# Altium PCB PCB.PcbDoc
Units mil, origin at the board's own origin, x right, y up, seen from the top; angles counter-clockwise.
Board outline 2435 x 2265 mil, 2 copper layers (Top Layer, Bottom Layer); 22 components, 11 nets, 57 pads, 5 vias.
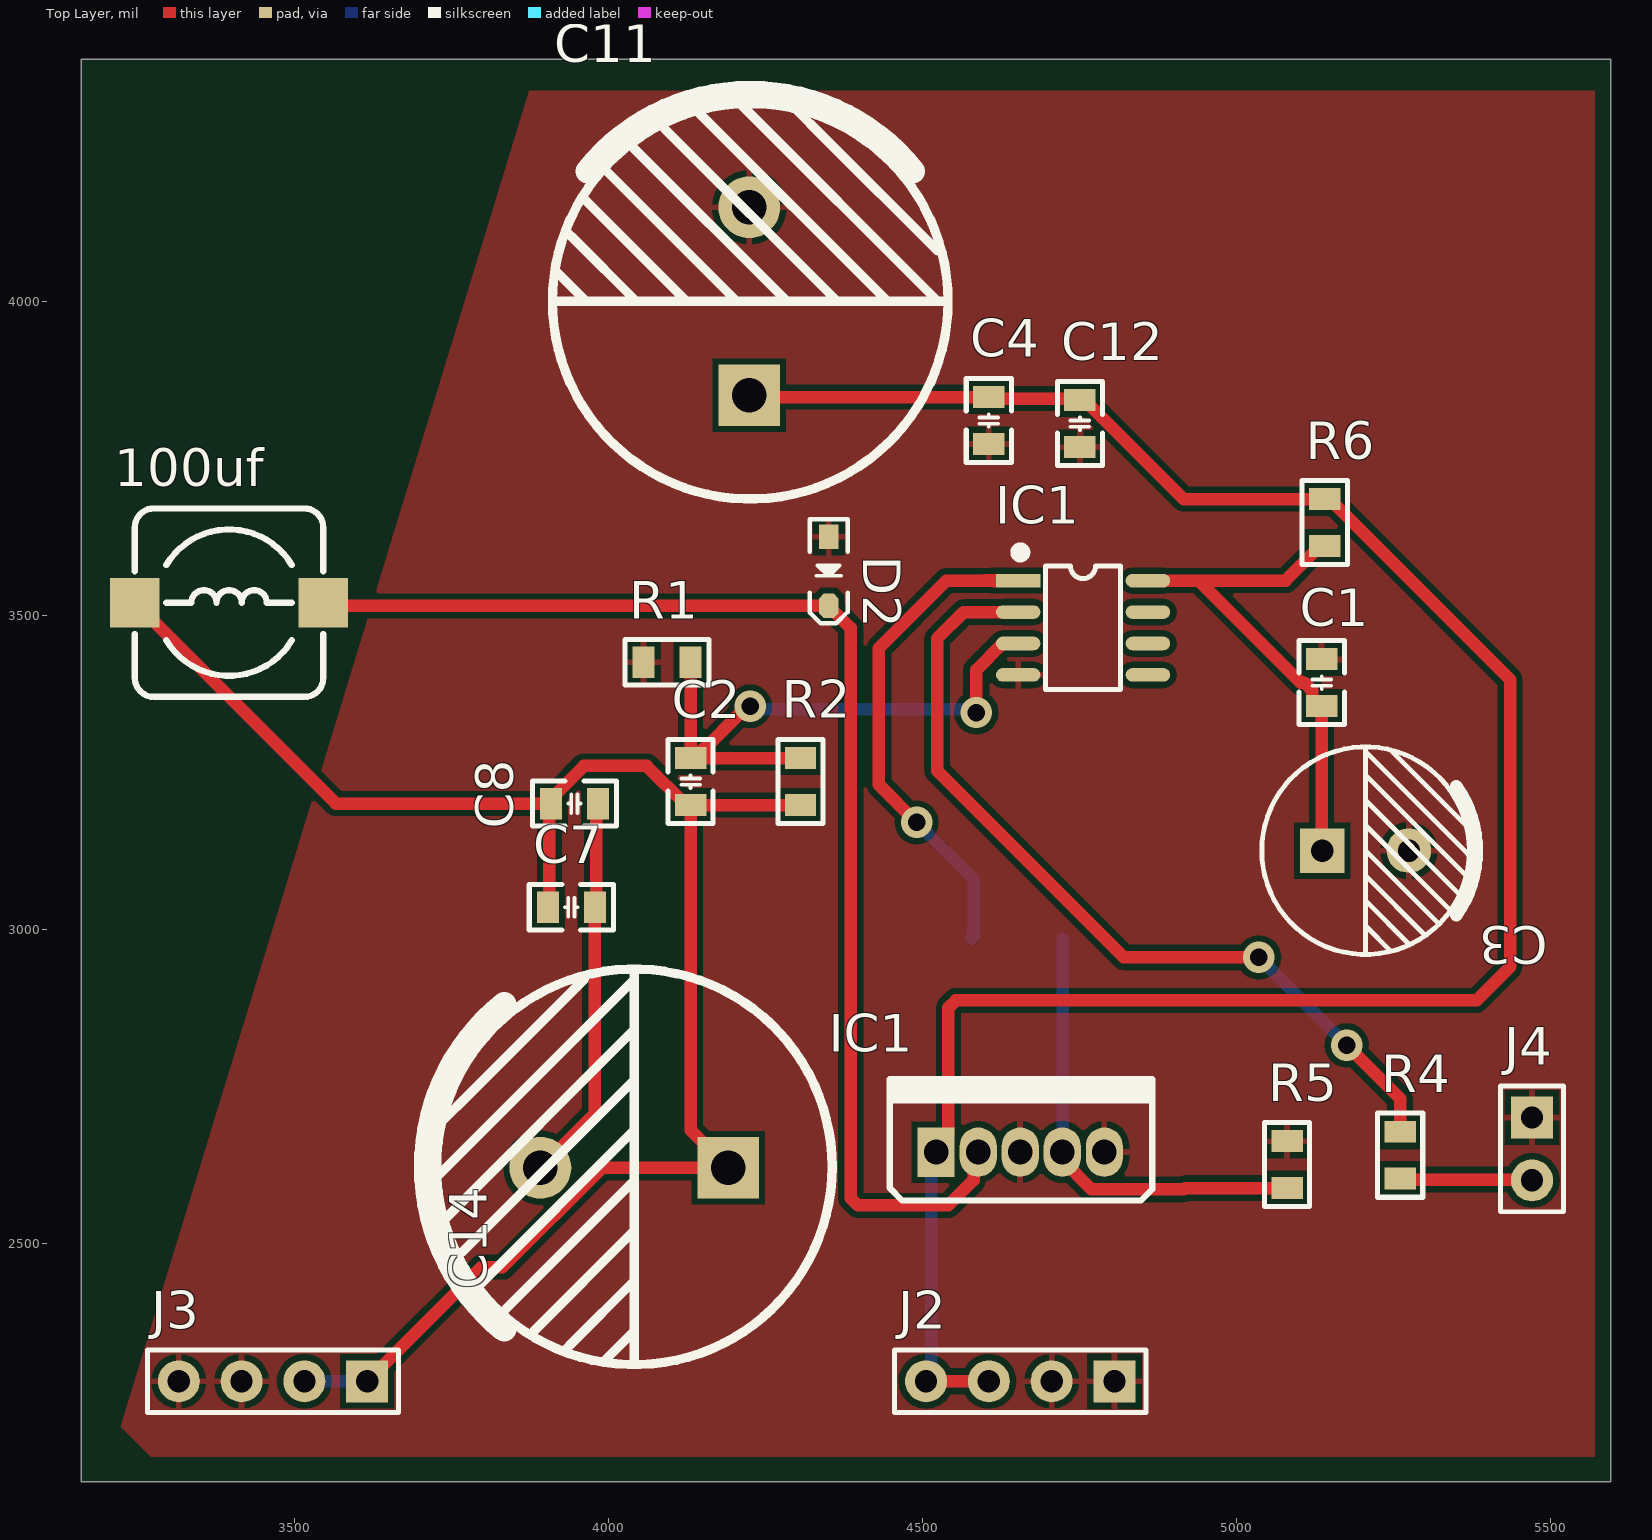
[diagram p0: Top Layer view]
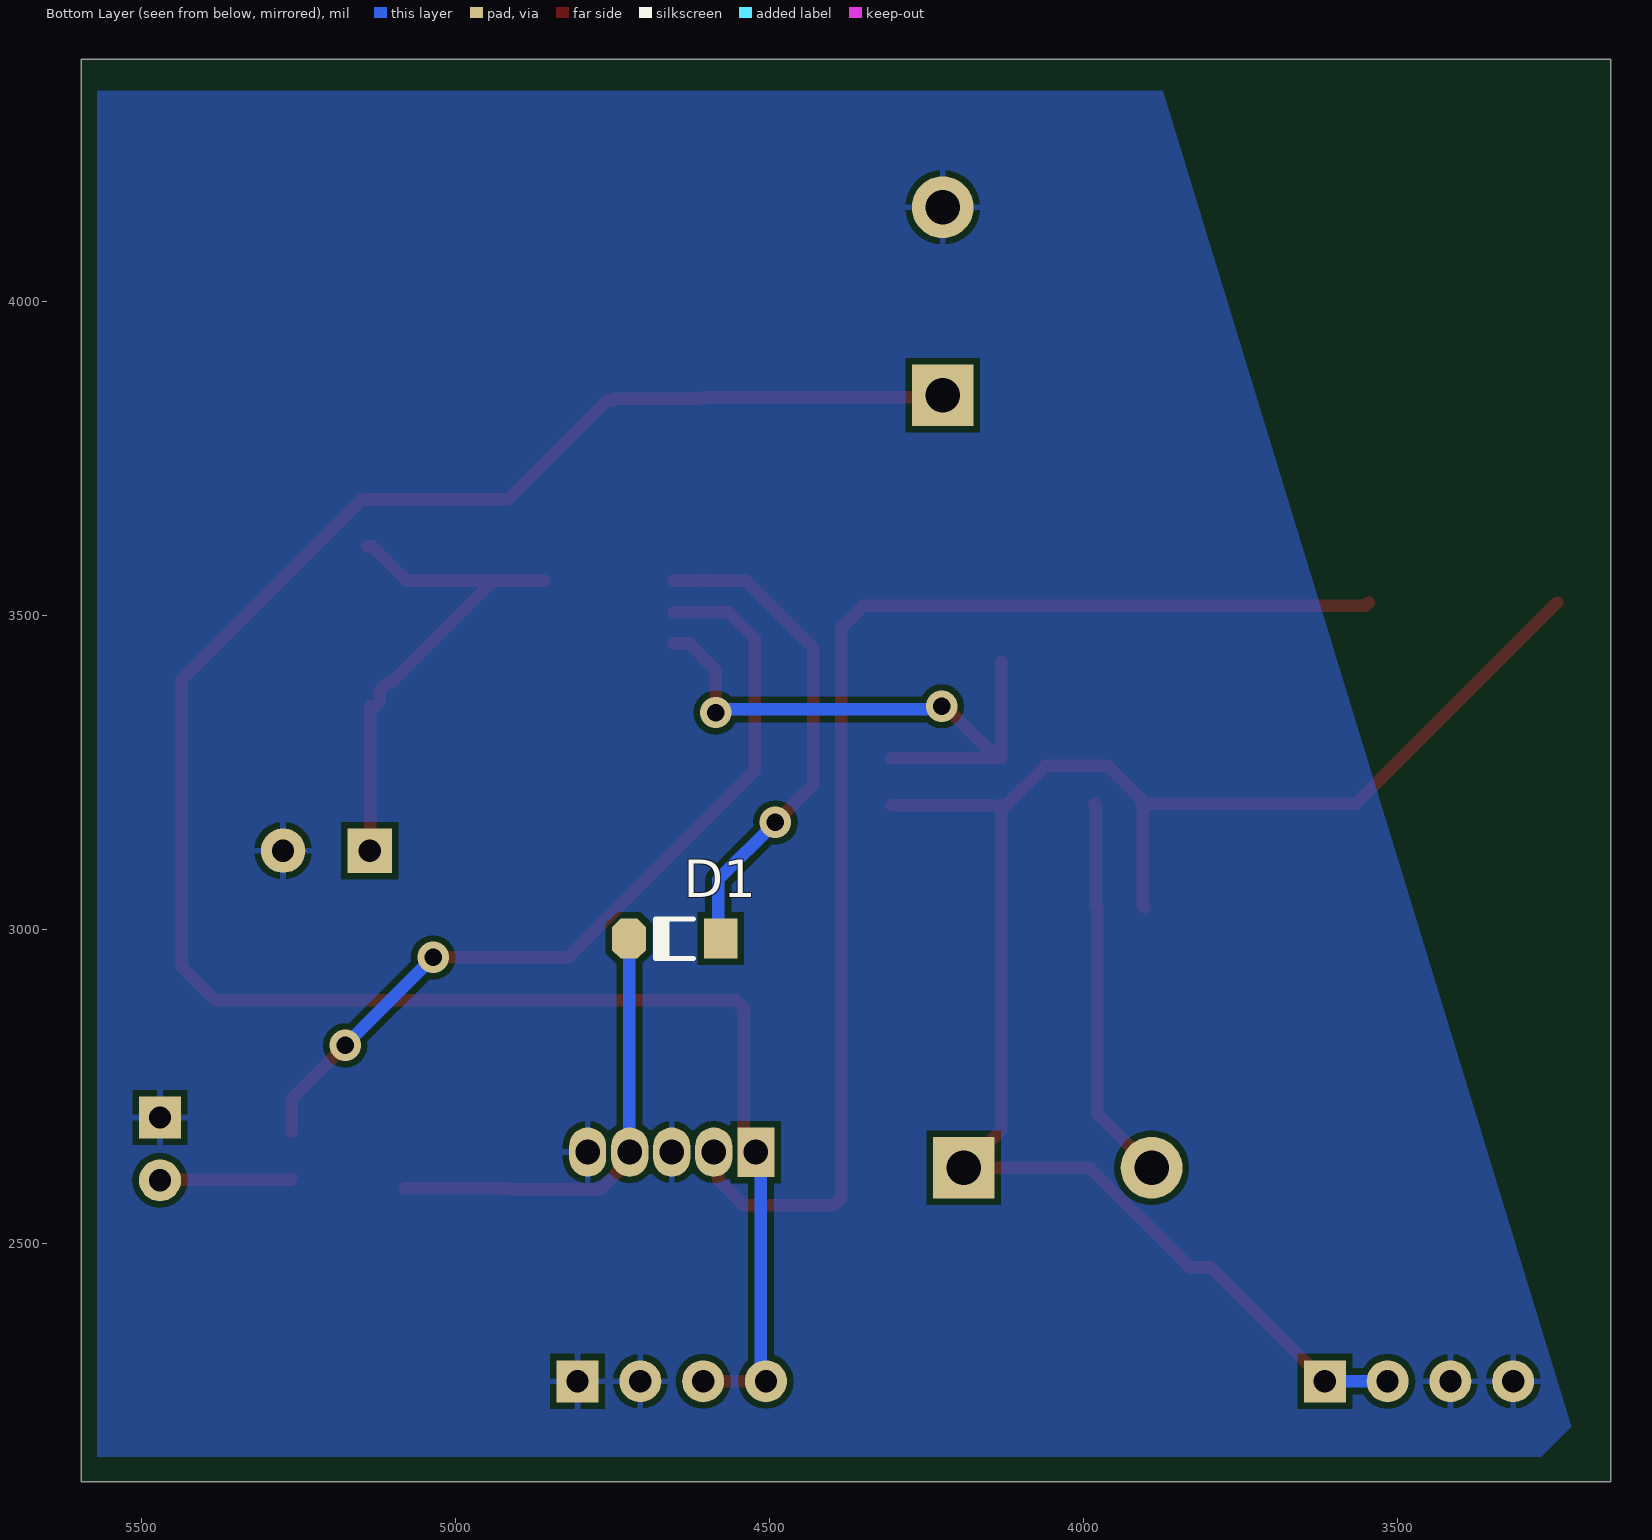
[diagram p1: Bottom Layer view, seen from below]

## Layer stack, top to bottom
Top Solder: solder mask 0.4, Solder Resist, Dk 3.5
Top Layer: signal copper 1.4
Dielectric 1: dielectric 12.6, FR-4, Dk 4.8
Bottom Layer: signal copper 1.4
Bottom Solder: solder mask 0.4, Solder Resist, Dk 3.5

## Board outline
3160,2120 5595,2120 5595,4385 3160,4385

## Design rules (kind name [scope] priority, off if disabled: settings)
Clearance [All] p1: gap=10 ignorepadtopadclearanceinfootprint=FALSE except(0: Arc-Hole Track-Hole SMDPad-Hole THPad-Hole Via-Hole Fill-Hole Poly-Hole Region-Hole Text-Hole)
PolygonConnect [All] p1: connectstyle=Relief reliefconductorwidth=10 reliefentries=4 polygonreliefangle="90 Angle" airgapwidth=10
RoutingVias [All] p1: holewidth=28 width=50 viastyle="Through Hole" minholewidth=28 minwidth=50 maxholewidth=28 maxwidth=50
SolderMaskExpansion [All] p1: expansion=4 istentingtop=FALSE
Width [All] p1: maxlimit=20 minlimit=20 preferedwidth=20 minimp=50.000000 maximp=50.000000 favimp=50.000000
30 further rules are at their usual default settings.

## Components (designator, comment, footprint, x,y, rotation, side; value= is the part's Value field where it differs from the comment)
100uf "L1" CDRH74 3395,3520 r0 top
C1 "104" "C 0805_L" 5135,3392.6 r270 top
C2 "101" "C 0805_L" 4130,3235 r270 top
C3 "100uf'" "CAP 3.5*8*11.5" 5205,3125 r0 top
C4 "104" "C 0805_L" 4605,3810 r90 top
C7 "104" "C 0805_L" 3940,3035 r180 top
C8 "104" "C 0805_L" 3945,3200 r180 top
C11 "2200uf'" "CAP 7.5*16*31.5" 4225,4000 r90 top
C12 "103" "C 0805_L" 4750,3805 r90 top
C14 "2200uf'" "CAP 7.5*16*31.5" 4040.39,2621.5 r180 top
D1 "1N4148" "MINI_MELF (LL34)" 4650,2985 r0 bottom
D2 "B5919WS" SOD-323 4350,3570 r270 top
IC1 "LM2596-adj" TO220-5A 4521.14,2645 r0 top
IC1 "LM358" SOP8_N 4755,3480 r0 top
J2 "+24VDC" HDR2.54-LI-4P 4655,2280 r180 top
J3 "Vout" HDR2.54-LI-4P 3465,2280 r180 top
J4 "HDR-1X2" HDR2.54-M-LI-2P 5470,2650 r270 top
R1 "10K" "R 0805_L" 4092.6,3425 r0 top
R2 "30K" "R 0805_L" 4305,3235 r270 top
R4 "1K" "R 0805_L" 5260,2640 r90 top
R5 "1K" "R 0805_L" 5080,2625 r90 top
R6 "10" "R 0805_L" 5140,3647.4 r90 top

## Footprints (in the part's own frame and the unit in brackets; to place one, negate y for a bottom-side part, rotate by r counter-clockwise, add the part's x,y. Pads: shape width x height; smd on the part's side, far side on the other; paste and mask are expansions set on the pad)
"C 0805_L" [mil] "无极性贴片电容                    @sucaita.com 素材塔"
  rect 35x50 smd: 1(-37.4,0) 2(37.4,0)
  silkscreen extent -67,-36 67,36, body extent -39,-24 39,24, height 20
"CAP 3.5*8*11.5" [mm] "脚距3.5mm直径8mm高度11.5mm"
  rect 1.8x1.8 hole 0.9: 1(-1.75,0)
  round 1.8 hole 0.9: 2(1.75,0)
  silkscreen extent -4.2,-4.2 4.5,4.2, body extent -4,-4 4.01,4, height 11.53
"CAP 7.5*16*31.5" [mm] "脚距7.5mm直径16mm高度31.5mm"
  rect 2.5x2.5 hole 1.4: 1(-3.8,0.038)
  round 2.5 hole 1.4: 2(3.8,0.038)
  silkscreen extent -8,-8 8.42,8, body extent -8,-8 8.01,8, height 31.53
CDRH74 [mm] "7.3*7.3*4.5mm（长宽高）"
  rect 2x2 smd: 1(-3.81,0) 2(3.81,0)
  silkscreen extent -3.81,-3.81 3.81,3.81, body extent -3.65,-3.65 3.65,3.65, height 4.5
HDR2.54-LI-4P [mm] "排针，4脚"
  rect 1.7x1.7 hole 0.9: 1(-3.81,0)
  round 1.7 hole 0.9: 2(-1.27,0) 3(1.27,0) 4(3.81,0)
  silkscreen extent -5.08,-1.27 5.08,1.27, body extent -5.08,-1.27 5.08,1.27, height 8.5
HDR2.54-M-LI-2P [mm] "排母，2脚"
  rect 1.7x1.7 hole 0.9: 1(-1.27,0)
  round 1.7 hole 0.9: 2(1.27,0)
  silkscreen extent -2.54,-1.27 2.54,1.27, body extent -2.54,-1.27 2.54,1.27, height 8.5
"MINI_MELF (LL34)" [mm] "1.5*3.4mm(直径，脚距）"
  rect 1.37x1.62 smd: 1(-1.855,0)
  oct 1.37x1.62 smd: 2(1.855,0)
  silkscreen extent -0.76,-0.8 0.78,0.8, body extent -1.7,-0.75 1.7,0.75, height 1.5
"R 0805_L" [mil] "1/8W贴片电阻"
  rect 35x50 smd: 1(-37.4,0) 2(37.4,0)
  silkscreen extent -67,-36 67,36, body extent -39,-25 39,25, height 20
SOD-323 [mm] "1.8x1.3X0.9mm（长宽高，不包括引脚）                    @sucaita.com 素材塔"
  rect 1x0.8 smd: 1(-1.4,0)
  oct 1x0.8 smd: 2(1.4,0)
  silkscreen extent -2.11,-0.76 2.11,0.76, body extent -1.34,-0.63 1.31,0.67, height 1
SOP8_N [mm] "5*6*1.8mm（长宽高）"
  rect 1.8x0.55 smd: 1(-2.625,1.905)
  oval 1.8x0.55 smd: 2(-2.625,0.635) 3(-2.625,-0.635) 4(-2.625,-1.905) 5(2.625,-1.905) 6(2.625,-0.635) 7(2.625,0.635) 8(2.625,1.905)
  silkscreen extent -2.69,-2.5 1.52,3.2, body extent -3,-2.5 3,2.5, height 1.9
TO220-5A [mm] "220，5脚晶体管                    @sucaita.com 素材塔"
  rect 1.5x2 hole 1: 1(0,0)
  oval 1.5x2 hole 1: 2(1.7,0) 3(3.4,0) 4(5.1,0) 5(6.8,0)
  silkscreen extent -1.88,-1.96 8.74,2.95, body extent -1.65,-1.8 8.45,2.7, height 17.5

## Part data
100uf: "电感"
C1 C2 C4 C7 C8 C12: library part C, "贴片电容", BOM名称=无极性贴片电容, 唯一出售店铺网址=https://shop463601444.taobao.com, 淘宝ID="封装库来自淘宝 ID：黄晶宝石", 联系售后，技术支持=https://shop463601444.taobao.com
C3 C11 C14: library part CAP-E, "电解电容"
D1: "开关二极管", BOM名称=高速开关二极管, 欢迎光临=https://shop463601444.taobao.com, 淘宝ID="封装库来自淘宝 ID：黄晶宝石"
D2: library part 1N5819, "肖特基二极管", BOM名称=肖特基二极管, 属性=40V/2A, 欢迎光临=https://shop463601444.taobao.com, 淘宝ID="封装库来自淘宝 ID：黄晶宝石"
IC1: library part LM2596, "DC降压芯片", BOM名称=DC稳压芯片, 学习资源=www.ooocke.com, 版权归属=源创客
IC1: "双路运放", BOM名称=双路运放, 封装库来自淘宝 ID：黄晶宝石=https://shop463601444.taobao.com, 版权归属=源创客
J2 J3: library part CON4, "Connector"
J4: library part "Header 2", "2P接插件", BOM名称=2P接插件, 版权归属="封装库来自淘宝 ID：黄晶宝石", 联系售后=https://shop463601444.taobao.com
R1 R2 R4 R5 R6: library part R, "贴片电阻", BOM名称=贴片电阻, 封装库来自淘宝卖家 ID：黄晶宝石=其他店铺购入均为盗版，不享受售后技术支持服务，请立即申请退款, 版权归属="来自淘宝 ID：黄晶宝石", 联系售后=https://shop463601444.taobao.com

## Via types
v1: diameter 50, hole 28, Top Layer to Bottom Layer, 5 vias

## Nets (pads, with @x,y where several pads share a name; then routed paths per layer and width w, separated by ;. In a path a pad name is that pad's centre, name@x,y a point inside that pad or via, vN(x,y) a via of type N, cw(c..) or ccw(c..) an arc to the next point about the centre after c; other vN are vias at no path point)
+24V: C4.2 C11.1 C12.2 IC1.1@4521.14,2645 J2.3 J2.4 R6.2 | length 3487.4
  Top Layer w20: C11.1 4226.5,3847.4 C4.2 4607.5,3844.9 4747.5,3844.9 C12.2 4757.5,3842.4 4915.1,3684.8 R6.2 5147.5,3684.8 5435,3397.3 5435,2940 5381.57,2886.57 4552.39,2886.57 4540.67,2874.85 4540.67,2674.37 4521.14,2654.84 IC1.1@4521.14,2645 ; J2.4 J2.3
  Bottom Layer w20: J2.4 4513.07,2288.07 4513.07,2636.93 IC1.1@4521.14,2645
GND: C1.1 C3.2 C4.1 C11.2 C12.1 D2.1 IC1.3@4655,2645 IC1.4@4651.65,3405 IC1.5@4788.86,2645 J2.1 J2.2 J3.3 J3.4 J4.1 R1.1 R5.2 | length 35.8
  Bottom Layer w20: IC1.3@4655,2632.04 IC1.3@4655,2645 ; J2.1@4788.86,2296.14 J2.1
Net100uf_2: 100uf.2 D2.2 IC1.2@4588.07,2645 | length 2029.5
  Top Layer w20: 100uf.2 3550.12,3514.88 D2.2 4385,3479.88 4385,2571.72 4396.72,2560 4540,2560 4580.6,2600.6 4580.6,2637.53 IC1.2@4588.07,2645
NetC1_2: C1.2 C3.1 IC1.8 R6.1 | length 823.8
  Top Layer w20: IC1.8 4939.22,3555 ; C3.1 5135,3126.1 C1.2 5127.5,3355.2 5120,3362.7 5120,3380 5107.5,3392.5 5101.72,3392.5 5090,3404.22 4939.22,3555 ; R6.1 5132.5,3610 5077.5,3555 4939.22,3555
NetC2_1: C2.1 IC1.3@4651.65,3455 R1.2 R2.1 | length 965.5
  Top Layer w20: R1.2 C2.1 C2.1@4137.5,3272.4 ; v1(4225,3355) 4220.09,3355 C2.1@4137.5,3272.4 ; R2.1 C2.1@4137.5,3272.4 ; v1(4585,3345) 4585,3412.95 4627.05,3455 IC1.3@4651.65,3455
  Bottom Layer w20: v1(4225,3355) 4230,3350 4580,3350 v1(4585,3345)
NetC7_1: C7.1 C8.1 C14.2 | length 618
  Top Layer w20: C14.2 3977.4,2706.62 C7.1 3979.9,3037.5 3979.9,3197.5 C8.1
NetD1_1: D1.1 IC1.1@4651.65,3555 | length 792.8
  Top Layer w20: v1(4490,3170) 4430,3230 4430,3447.43 4537.57,3555 IC1.1@4651.65,3555
  Bottom Layer w20: v1(4490,3170) 4580.98,3079.02 4580.98,2989.02 D1.1
NetD1_2: D1.2 IC1.4@4721.93,2645 R5.1 | length 744.5
  Top Layer w20: IC1.4@4721.93,2645 4721.93,2632.04 4768.34,2585.63 4915.69,2585.63 4917.66,2587.6 R5.1
  Bottom Layer w20: IC1.4@4721.93,2657.96 4721.93,2645 4722.48,2645.55 4722.48,2984.45 D1.2
NetIC1_2: IC1.2@4651.65,3505 R4.2 | length 1363.2
  Top Layer w20: IC1.2@4651.65,3505 4565,3505 4522.55,3462.55 4522.55,3252.45 4820,2955 v1(5035,2955) ; v1(5175,2815) 5260,2730 R4.2
  Bottom Layer w20: v1(5035,2955) v1(5175,2815)
Vout: 100uf.1 C2.2 C7.2 C8.2 C14.1 J3.1 J3.2 R2.2 | length 2812.9
  Top Layer w20: 100uf.1 3565,3200 C8.2 ; J3.1 3796.73,2461.73 3830.4,2461.73 3988.67,2620 C14.1 4130,2680 C2.2 ; C7.2 3905.1,3037.5 3905.1,3197.5 C8.2 ; C2.2@4122.5,3197.6 4060.1,3260 3960.1,3260 3907.6,3207.5 C8.2 ; C2.2@4142.6,3197.6 R2.2
  Bottom Layer w20: J3.2 J3.1
Vset:0~3.3V: J4.2 R4.1 | length 211.1
  Top Layer w20: R4.1 5261.3,2601.3 5468.7,2601.3 J4.2
pads on no net: IC1.5@4858.35,3405 IC1.6 IC1.7

## Polygon pours and split planes (outlines as drawn)
no net on Top Layer "NONET_L01_P021" (solid, remove dead copper, pour order 21): 3872.94,4335
GND on Top Layer "GND_L01_P020" (solid, remove dead copper, pour order 20): 3872.94,4335 5570,4335 5570,2160 3270,2160 3222.25,2207.75
no net on Top Layer "NONET_L01_P003" (solid, remove dead copper, pour order 3): 3795,4125
GND on Bottom Layer "GND_L02_P022" (solid, remove dead copper, pour order 22): 3872.94,4335 5570,4335 5570,2160 3270,2160 3222.25,2207.75

## Silkscreen, mask and mechanical layers (free items; w line width, h text height)
Mechanical 1:
  the board outline again, w20